# Altium PCB AVR Board 4.0 R1.2 Alternate.PcbDoc (part 2 of 2)
Units mil, origin at the board's own origin, x right, y up, seen from the top; angles counter-clockwise.
Board outline 5050 x 3125 mil, 2 copper layers (Top Layer, Bottom Layer); 127 components, 141 nets, 588 pads, 126 vias.
Unrouted connection lines stored in the file: 100.
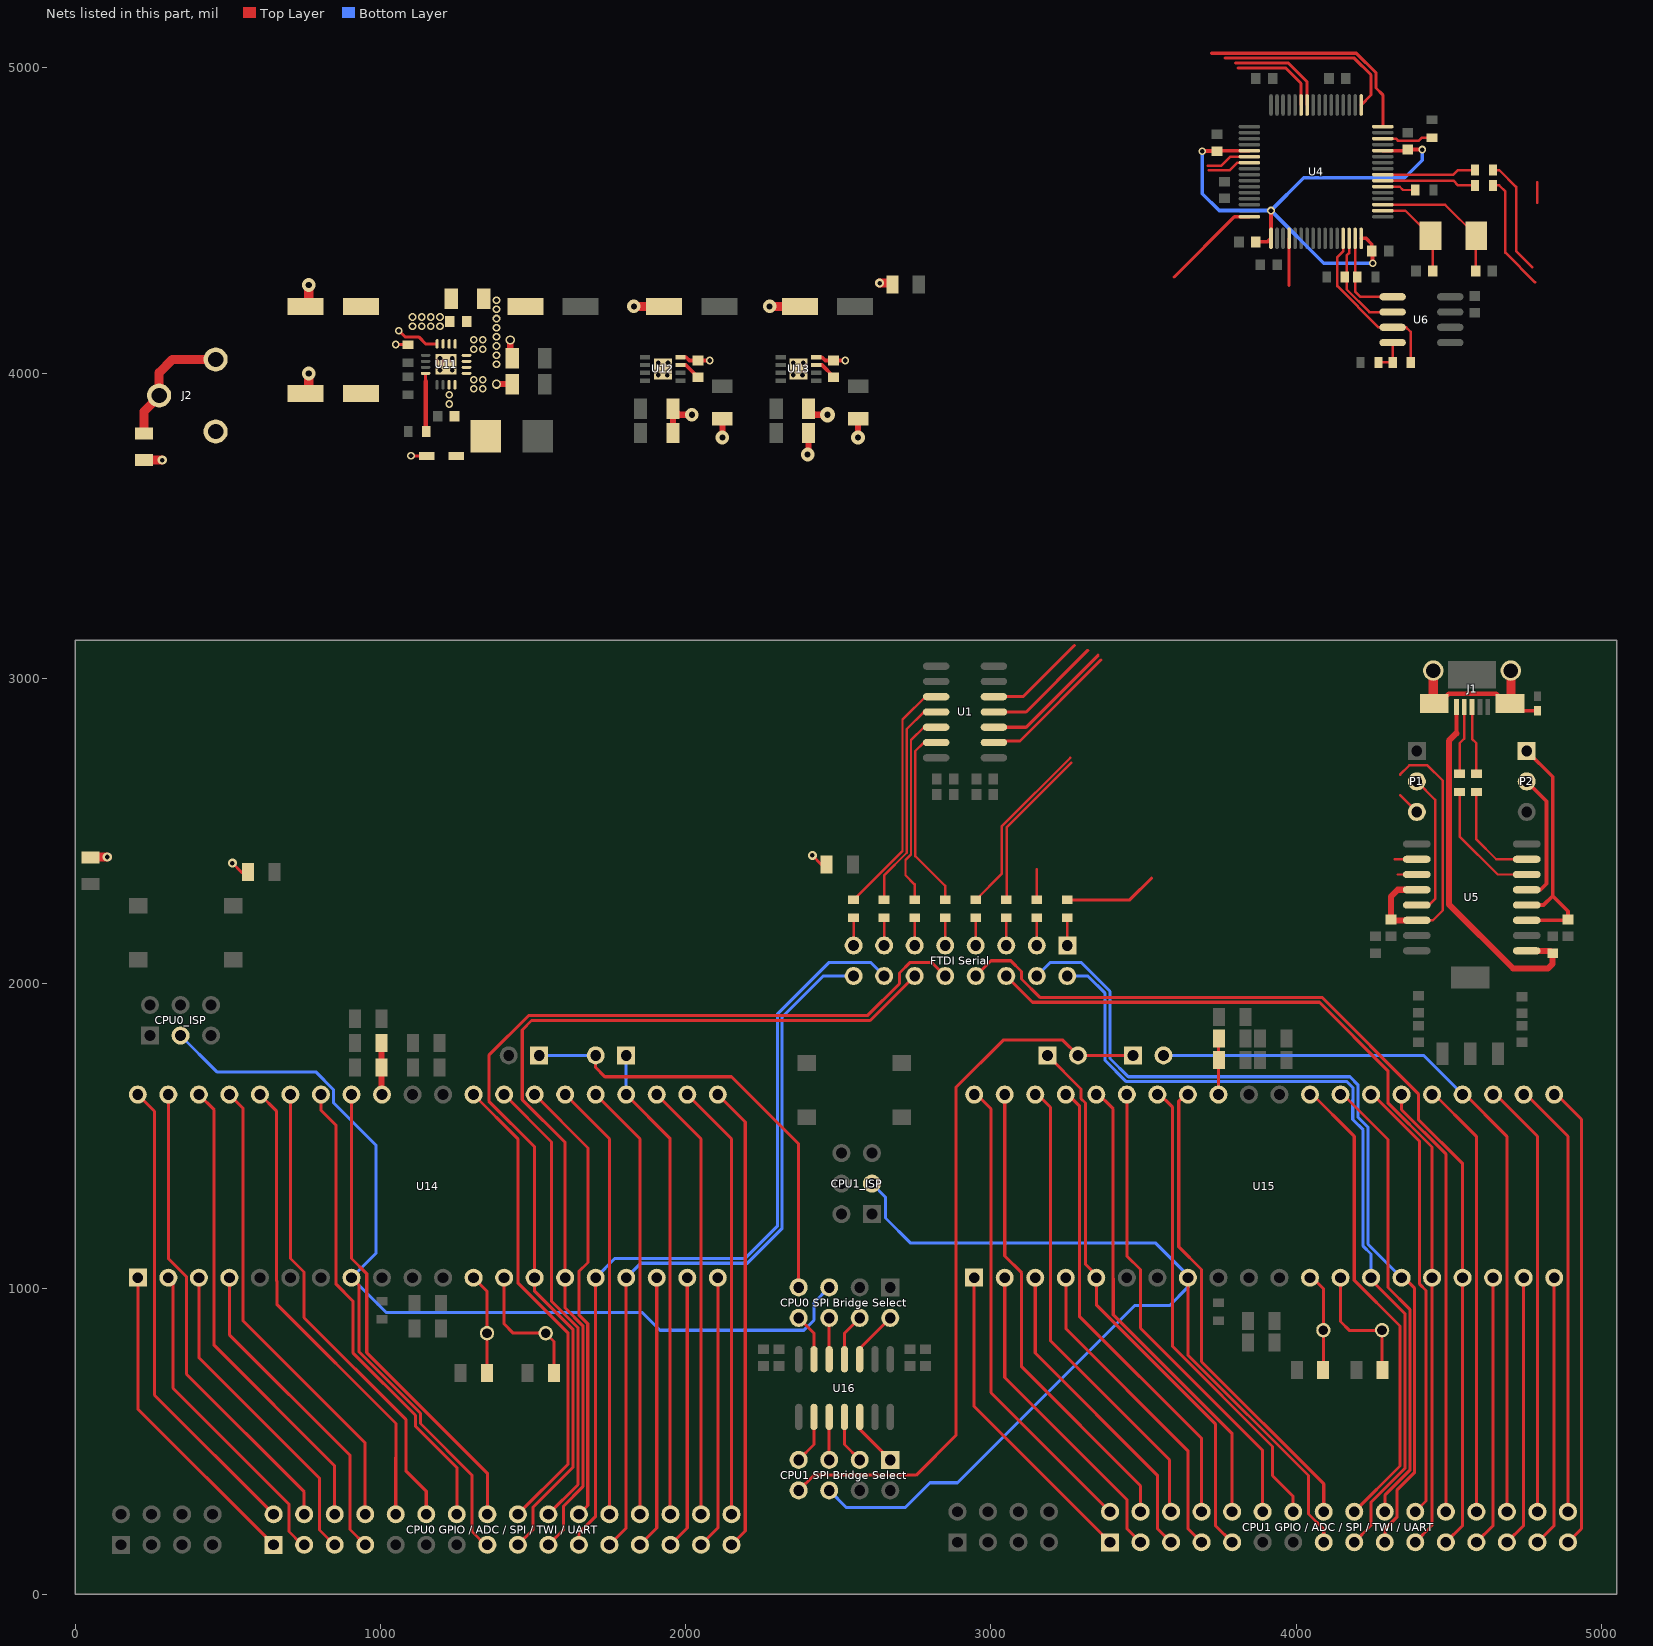
[diagram p2: the nets of this part, all layers, seen from the top]

## Via types
v1: diameter 25, hole 15, Top Layer to Bottom Layer, 82 vias
v2: diameter 30, hole 15, Top Layer to Bottom Layer, 25 vias
v3: diameter 45, hole 20, Top Layer to Bottom Layer, 14 vias
v4: diameter 30, hole 20, Top Layer to Bottom Layer, 4 vias
v5: diameter 50, hole 20, Top Layer to Bottom Layer, 1 vias

## Nets (pads, with @x,y where several pads share a name; then routed paths per layer and width w, separated by ;. In a path a pad name is that pad's centre, name@x,y a point inside that pad or via, vN(x,y) a via of type N, cw(c..) or ccw(c..) an arc to the next point about the centre after c; other vN are vias at no path point) (continued)
NetC17_2: C17.2 C18.2 C19.2 C20.2 U4.12 U4.37 U4.49 U4.64 | length 1926.9
  Top Layer w12: v1(3692.44,4727.44) C18.2@3740,4727.44 ; C18.2@3740,4728.9 U4.37@3846.5,4728.9 ; C20.2@3867.56,4430 3906.14,4430 U4.49@3917.64,4441.5 ; U4.49@3917.36,4441.5 v1(3917.36,4532.64) ; U4.64@4212.64,4441.5 4228.5,4441.5 4247.44,4422.56 C17.2@4247.44,4400 4250,4397.44 v1(4250,4360) ; U4.12@4283.5,4728.9 4361.46,4728.9 C19.2@4365,4732.44 v1(4412.56,4732.44)
  Bottom Layer w12: v1(3692.44,4727.44) 3692.44,4587.56 3747.36,4532.64 v1(3917.36,4532.64) ; v1(4250,4360) 4090,4360 v1(3917.36,4532.64) ; v1(4412.56,4732.44) 4412.56,4697.56 4355,4640 4024.72,4640 v1(3917.36,4532.64)
NetC21_2: C21.2 P1.3 U5.12 U5.14 | length 1097.1
  Top Layer w8: 4340,2617.5 P1.3@4395,2562.5 ; 4340,2685 4370,2715 4430,2715 4480,2665 4480,2240 4447.5,2207.5 U5.14@4394.88,2207.5 ; 4790,4557.5 4790,4625
  Top Layer w20: U5.14@4394.88,2207.5 4312.56,2207.5 C21.2@4310,2210.06 4310,2285 4332.5,2307.5 U5.12@4394.88,2307.5
NetC23_2: C23.2 J1.1 U5.1 | length 1185.5
  Top Layer w12: 4524.8,2819.8 4524.8,2879.04
  Top Layer w20: 4524.8,2819.8 4500,2795 4500,2260 4710,2050 4825,2050 4840,2065 C23.2@4840,2099.94 4832.44,2107.5 U5.1@4755.12,2107.5
NetC24_2: C24.2 P2.1 U5.3 U5.4 | length 841.6
  Top Layer w12: P2.1@4755,2762.5 4840,2677.5 4840,2287.5 ; U5.3@4755.12,2207.5 4887.44,2207.5 C24.2@4890,2210.06 4890,2237.5 4840,2287.5 ; U5.4@4755.12,2257.5 4810,2257.5 4840,2287.5
NetC26_2: C26.2 U4.2 X1.1 | length 308.6
  Top Layer w8: U4.2@4283.5,4532.05 4357.95,4532.05 X1.1@4440,4450 4447.56,4442.44 C26.2@4447.56,4335
NetC27_2: C27.2 U4.3 X1.2 | length 464.1
  Top Layer w8: U4.3@4283.5,4551.73 4487.87,4551.73 X1.2@4589.61,4450 4587.44,4447.83 C27.2@4587.44,4335
NetC48_2: C48.2 U12.3 | length 73.6
  Top Layer w12: U12.3@1983.07,4026.57 1999.65,4026.57 C48.2@2040,3986.22
NetC53_2: C53.2 U13.3 | length 74.9
  Top Layer w12: U13.3@2427.52,4026.57 2446.2,4026.57 2484.45,3988.32 C53.2@2484.45,3986.22
NetC63_2: C63.2 FB7.2 U14.32 | length 169
  Top Layer w20: FB7.2@1003.31,1805 C63.2@1003.31,1725 1003.31,1638.41 U14.32@1005,1636.72
NetC65_2: C65.2 FB8.2 U15.32 | length 175.7
  Top Layer w10: U15.32@3745,1645 3745,1818.31 FB8.2@3746.69,1820
NetC66_2: C66.2 U14.12 X2.1 | length 329.3
  Top Layer w10: U14.12@1305,1036.72 1348.94,992.78 X2.1@1348.94,855 C66.2@1348.94,725.63
NetC67_2: C67.2 U14.13 X2.2 | length 441.5
  Top Layer w10: U14.13@1405,1036.72 1405,885 1435,855 X2.2@1541.06,855 1568.31,827.76 C67.2@1568.31,725
NetC68_2: C68.2 U15.12 X3.1 | length 328.5
  Top Layer w10: U15.12@4045,1045 4088.94,1001.06 X3.1@4088.94,865 4088.94,735.63 C68.2@4088.31,735
NetC69_2: C69.2 U15.13 X3.2 | length 431.1
  Top Layer w10: U15.13@4145,1045 4145,893.28 4175,863.28 X3.2@4281.06,863.28 ; X3.2@4281.06,865 X3.2@4281.06,863.28 ; C69.2@4283.31,735 4281.06,737.24 X3.2@4281.06,863.28
"NetCPU0 GPIO / ADC / SPI / TWI / UART_1": "CPU0 GPIO / ADC / SPI / TWI / UART.1" U14.1 | length 1059.3
  Top Layer w10: U14.1@205,1036.72 205,606.72 650,161.72
"NetCPU0 GPIO / ADC / SPI / TWI / UART_2": "CPU0 GPIO / ADC / SPI / TWI / UART.2" U14.40 | length 1559.3
  Top Layer w10: U14.40@205,1636.72 260,1581.72 260,651.72 650,261.72
"NetCPU0 GPIO / ADC / SPI / TWI / UART_3": "CPU0 GPIO / ADC / SPI / TWI / UART.3" U14.2 | length 1065.7
  Top Layer w10: U14.2@305,1036.72 320,1021.72 320,675 700,295 700,205 739.14,165.86 754.14,165.86
"NetCPU0 GPIO / ADC / SPI / TWI / UART_4": "CPU0 GPIO / ADC / SPI / TWI / UART.4" U14.39 | length 1559.3
  Top Layer w10: U14.39@305,1636.72 305,1099.69 364.47,1040.21 364.47,720.53 750,335 750,261.72
"NetCPU0 GPIO / ADC / SPI / TWI / UART_5": "CPU0 GPIO / ADC / SPI / TWI / UART.5" U14.3 | length 1068.1
  Top Layer w10: U14.3@405,1036.72 405,775 800,380 800,210 855,155
"NetCPU0 GPIO / ADC / SPI / TWI / UART_6": "CPU0 GPIO / ADC / SPI / TWI / UART.6" U14.38 | length 1559.3
  Top Layer w10: U14.38@405,1636.72 455,1586.72 455,815 850,420 850,261.72
"NetCPU0 GPIO / ADC / SPI / TWI / UART_7": "CPU0 GPIO / ADC / SPI / TWI / UART.7" U14.4 | length 1059.3
  Top Layer w10: U14.4@505,1036.72 505,850 900,455 900,211.72 950,161.72
"NetCPU0 GPIO / ADC / SPI / TWI / UART_8": "CPU0 GPIO / ADC / SPI / TWI / UART.8" U14.37 | length 1566
  Top Layer w10: U14.37@505,1636.72 549.53,1592.19 549.53,895.47 950,495 950,255
"NetCPU0 GPIO / ADC / SPI / TWI / UART_10": "CPU0 GPIO / ADC / SPI / TWI / UART.10" U14.36 | length 1560.2
  Top Layer w10: U14.36@605,1636.72 660,1581.72 660,1026.72 660.47,1026.24 660.47,949.78 1051,559.25 1051,447.86 1050,446.86 1050,261.72
"NetCPU0 GPIO / ADC / SPI / TWI / UART_12": "CPU0 GPIO / ADC / SPI / TWI / UART.12" U14.35 | length 1559.3
  Top Layer w10: U14.35@705,1636.72 705,1099.69 749.53,1055.16 749.53,905.98 1083,572.51 1083,404.37 1150,337.37 1150,261.72
"NetCPU0 GPIO / ADC / SPI / TWI / UART_14": "CPU0 GPIO / ADC / SPI / TWI / UART.14" U14.34 | length 1559.3
  Top Layer w10: U14.34@805,1636.72 805,1585 855,1535 855,1015 909.53,960.47 909.53,791.24 1115,585.76 1115,550 1250,415 1250,261.72
"NetCPU0 GPIO / ADC / SPI / TWI / UART_16": "CPU0 GPIO / ADC / SPI / TWI / UART.16" U14.33 | length 1559.3
  Top Layer w10: U14.33@905,1636.72 905,1099.69 955,1049.69 955,791.02 1350,396.02 1350,261.72
"NetCPU0 GPIO / ADC / SPI / TWI / UART_17": "CPU0 GPIO / ADC / SPI / TWI / UART.17" "FTDI Serial.10" U14.14 | length 3453.1
  Top Layer w10: 1450,161.72 1500,211.72 1500,285.25 1631,416.25 1631,866.12 1505,992.12 U14.14@1505,1036.72 1505,1465 1355,1615 1355,1765 1485,1895 2595,1895 2700,2000 2700,2035 2735,2070 2805,2070 2850,2025
"NetCPU0 GPIO / ADC / SPI / TWI / UART_18": "CPU0 GPIO / ADC / SPI / TWI / UART.18" U14.29 | length 1571.8
  Top Layer w10: U14.29@1305,1636.72 1450,1491.72 1450,1020 1615,855 1615,426.72 1450,261.72
"NetCPU0 GPIO / ADC / SPI / TWI / UART_19": "CPU0 GPIO / ADC / SPI / TWI / UART.19" "FTDI Serial.12" U14.15 | length 3174.4
  Top Layer w10: 1550,161.72 1600,211.72 1600,289.09 1663,352.09 1663,879.37 1605,937.37 U14.15@1605,1036.72 1605,1479.4 1464.47,1619.93 1464.47,1848.47 1495,1879 2604,1879 2750,2025
"NetCPU0 GPIO / ADC / SPI / TWI / UART_20": "CPU0 GPIO / ADC / SPI / TWI / UART.20" U14.28 | length 1515.4
  Top Layer w10: U14.28@1405,1636.72 1560.47,1481.24 1560.47,959.27 1647,872.75 1647,358.72 1550,261.72
"NetCPU0 GPIO / ADC / SPI / TWI / UART_21": "CPU0 GPIO / ADC / SPI / TWI / UART.21" "FTDI Serial.14" U14.16 | length 2696.5
  Top Layer w10: 1650,161.72 1650,200 1705,255 U14.16@1705,1036.72
  Bottom Layer w10: U14.16@1705,1036.72 1768.28,1100 2195,1100 2300,1205 2300,1900 2470,2070 2605,2070 2650,2025
"NetCPU0 GPIO / ADC / SPI / TWI / UART_22": "CPU0 GPIO / ADC / SPI / TWI / UART.22" U14.27 | length 1483.9
  Top Layer w10: U14.27@1505,1636.72 1680,1461.72 1680,1086.72 1650,1056.72 1650,915 1679,886 1679,290.72 1650,261.72
"NetCPU0 GPIO / ADC / SPI / TWI / UART_23": "CPU0 GPIO / ADC / SPI / TWI / UART.23" "FTDI Serial.16" U14.17 | length 2457.9
  Top Layer w10: 1750,161.72 1805,216.72 U14.17@1805,1036.72
  Bottom Layer w10: U14.17@1805,1036.72 1852.28,1084 2201.63,1084 2316,1198.37 2316,1891 2450,2025 2550,2025
"NetCPU0 GPIO / ADC / SPI / TWI / UART_24": "CPU0 GPIO / ADC / SPI / TWI / UART.24" U14.26 | length 1435.1
  Top Layer w10: U14.26@1605,1636.72 1750,1491.72 1750,261.72
"NetCPU0 GPIO / ADC / SPI / TWI / UART_25": "CPU0 GPIO / ADC / SPI / TWI / UART.25" U14.18 | length 897.8
  Top Layer w10: 1850,161.72 1905,216.72 U14.18@1905,1036.72
"NetCPU0 GPIO / ADC / SPI / TWI / UART_26": "CPU0 GPIO / ADC / SPI / TWI / UART.26" U14.25 | length 1435.1
  Top Layer w10: U14.25@1705,1636.72 1850,1491.72 1850,261.72
"NetCPU0 GPIO / ADC / SPI / TWI / UART_27": "CPU0 GPIO / ADC / SPI / TWI / UART.27" U14.19 | length 897.8
  Top Layer w10: 1950,161.72 2005,216.72 U14.19@2005,1036.72
"NetCPU0 GPIO / ADC / SPI / TWI / UART_28": "CPU0 GPIO / ADC / SPI / TWI / UART.28" P6.1 U14.24 | length 1564.5
  Top Layer w10: U14.24@1805,1636.72 1948.03,1493.69 1948.03,261.72 1950,261.72
  Bottom Layer w10: U14.24@1805,1636.72 P6.1@1805,1765
"NetCPU0 GPIO / ADC / SPI / TWI / UART_29": "CPU0 GPIO / ADC / SPI / TWI / UART.29" U14.20 | length 897.8
  Top Layer w10: 2050,161.72 2105,216.72 U14.20@2105,1036.72
"NetCPU0 GPIO / ADC / SPI / TWI / UART_30": "CPU0 GPIO / ADC / SPI / TWI / UART.30" U14.23 | length 1435.1
  Top Layer w10: U14.23@1905,1636.72 2050,1491.72 2050,261.72
"NetCPU0 GPIO / ADC / SPI / TWI / UART_31": "CPU0 GPIO / ADC / SPI / TWI / UART.31" U14.21 | length 1530.9
  Top Layer w10: U14.21@2105,1636.72 2195,1546.72 2195,206.72 2150,161.72
"NetCPU0 GPIO / ADC / SPI / TWI / UART_32": "CPU0 GPIO / ADC / SPI / TWI / UART.32" U14.22 | length 1435.1
  Top Layer w10: U14.22@2005,1636.72 2150,1491.72 2150,261.72
"NetCPU0 SPI Bridge Select_2": "CPU0 SPI Bridge Select.2" U16.10 | length 141.4
  Top Layer w10: U16.10@2570,805 2670,905
"NetCPU0 SPI Bridge Select_4": "CPU0 SPI Bridge Select.4" U16.11 | length 156.2
  Top Layer w10: U16.11@2520,769.49 2520,855 2570,905
"NetCPU0 SPI Bridge Select_6": "CPU0 SPI Bridge Select.6" U16.12 | length 135.5
  Top Layer w10: U16.12@2470,769.49 2470,905
"NetCPU0 SPI Bridge Select_7": "CPU0 SPI Bridge Select.7" P3.1 P6.2 | length 1463.6
  Top Layer w10: P6.2@1705,1765 1705,1725 1735,1695 2150,1695 2370,1475 2370,1005
  Bottom Layer w10: P3.1@1520,1765 P6.2@1705,1765
"NetCPU0 SPI Bridge Select_8": "CPU0 SPI Bridge Select.8" U16.13 | length 156.2
  Top Layer w10: 2370,905 2420,855 U16.13@2420,769.49
"NetCPU1 GPIO / ADC / SPI / TWI / UART_1": "CPU1 GPIO / ADC / SPI / TWI / UART.1" U15.1 | length 1059.3
  Top Layer w10: U15.1@2945,1045 2945,615 3390,170
"NetCPU1 GPIO / ADC / SPI / TWI / UART_2": "CPU1 GPIO / ADC / SPI / TWI / UART.2" U15.40 | length 1559.3
  Top Layer w10: U15.40@2945,1645 3000,1590 3000,660 3390,270
"NetCPU1 GPIO / ADC / SPI / TWI / UART_3": "CPU1 GPIO / ADC / SPI / TWI / UART.3" U15.2 | length 1059.3
  Top Layer w10: U15.2@3045,1045 3045,710 3445,310 3445,215 3490,170
"NetCPU1 GPIO / ADC / SPI / TWI / UART_4": "CPU1 GPIO / ADC / SPI / TWI / UART.4" U15.39 | length 1559.3
  Top Layer w10: U15.39@3045,1645 3045,1107.97 3100.47,1052.5 3100.47,744.53 3490,355 3490,270
"NetCPU1 GPIO / ADC / SPI / TWI / UART_5": "CPU1 GPIO / ADC / SPI / TWI / UART.5" U15.3 | length 1059.3
  Top Layer w10: U15.3@3145,1045 3145,790 3545,390 3545,215 3590,170
"NetCPU1 GPIO / ADC / SPI / TWI / UART_6": "CPU1 GPIO / ADC / SPI / TWI / UART.6" U15.38 | length 1559.3
  Top Layer w10: U15.38@3145,1645 3195,1595 3195,830 3585,440 3585,275 3590,270
"NetCPU1 GPIO / ADC / SPI / TWI / UART_7": "CPU1 GPIO / ADC / SPI / TWI / UART.7" U15.4 | length 1059.3
  Top Layer w10: U15.4@3245,1045 3245,870 3645,470 3645,215 3690,170
"NetCPU1 GPIO / ADC / SPI / TWI / UART_8": "CPU1 GPIO / ADC / SPI / TWI / UART.8" U15.37 | length 1559.3
  Top Layer w10: U15.37@3245,1645 3289.53,1600.47 3289.53,910.47 3690,510 3690,270
"NetCPU1 GPIO / ADC / SPI / TWI / UART_9": "CPU1 GPIO / ADC / SPI / TWI / UART.9" P4.1 U15.5 | length 1845.6
  Top Layer w10: P4.1@3185,1765 3295,1655 3295,1623.28 3309.53,1608.76 3309.53,1080.47 3345,1045 3345,947.88 3735,557.88 3735,225 3790,170
"NetCPU1 GPIO / ADC / SPI / TWI / UART_10": "CPU1 GPIO / ADC / SPI / TWI / UART.10" U15.36 | length 1559.3
  Top Layer w10: U15.36@3345,1645 3400,1590 3400,1035 3400.47,1034.53 3400.47,915.04 3790,525.51 3790,270
"NetCPU1 GPIO / ADC / SPI / TWI / UART_12": "CPU1 GPIO / ADC / SPI / TWI / UART.12" U15.35 | length 1559.3
  Top Layer w10: U15.35@3445,1645 3445,1107.97 3489.53,1063.44 3489.53,871.24 3890,470.76 3890,270
"NetCPU1 GPIO / ADC / SPI / TWI / UART_14": "CPU1 GPIO / ADC / SPI / TWI / UART.14" U15.34 | length 1559.3
  Top Layer w10: U15.34@3545,1645 3595,1595 3595,811.02 3922,484.02 3922,388 3990,320 3990,270
"NetCPU1 GPIO / ADC / SPI / TWI / UART_16": "CPU1 GPIO / ADC / SPI / TWI / UART.16" U15.33 | length 1584.2
  Top Layer w10: U15.33@3645,1645 3615,1615 3615,1137.97 3689.53,1063.44 3689.53,761.75 4090,361.27 4090,270
"NetCPU1 GPIO / ADC / SPI / TWI / UART_17": "CPU1 GPIO / ADC / SPI / TWI / UART.17" "FTDI Serial.2" U15.14 | length 2853.4
  Top Layer w10: 4190,170 4245,225 4245,301.37 4356,412.37 4356,919 4245,1030 U15.14@4245,1036.72 U15.14@4245,1045
  Bottom Layer w10: 3250,2025 3317.37,2025 3374,1968.37 3374,1748.37 3443.37,1679 4166,1679 4185.53,1659.47 4185.53,1619.93 4185,1619.4 4185,1555 4219,1521 4219,1140.09 4245,1114.09 U15.14@4245,1036.72
"NetCPU1 GPIO / ADC / SPI / TWI / UART_18": "CPU1 GPIO / ADC / SPI / TWI / UART.18" U15.29 | length 1559.3
  Top Layer w10: U15.29@4045,1645 4190,1500 4190,1028.28 4340,878.28 4340,420 4190,270
"NetCPU1 GPIO / ADC / SPI / TWI / UART_19": "CPU1 GPIO / ADC / SPI / TWI / UART.19" "FTDI Serial.4" U15.15 | length 2990.5
  Top Layer w10: 4290,170 4290,212.69 4330.53,253.21 4330.53,341.65 4388,399.12 4388,1002 U15.15@4345,1045
  Bottom Layer w10: 3150,2025 3195,2070 3295,2070 3390,1975 3390,1755 3450,1695 4175.94,1695 4201.88,1669.06 4201.88,1563.12 4235,1530 4235,1146.72 U15.15@4345,1036.72
"NetCPU1 GPIO / ADC / SPI / TWI / UART_20": "CPU1 GPIO / ADC / SPI / TWI / UART.20" U15.28 | length 1503
  Top Layer w10: U15.28@4145,1645 4300.47,1489.53 4300.47,1004.53 4372,933 4372,405.75 4290,323.75 4290,270
"NetCPU1 GPIO / ADC / SPI / TWI / UART_21": "CPU1 GPIO / ADC / SPI / TWI / UART.21" "FTDI Serial.6" U15.16 | length 3006.2
  Top Layer w10: 3050,2025 3136,1939 4076,1939 4300,1715 4300,1609.75 4445,1464.75 U15.16@4445,1036.72 4445,225 4390,170
"NetCPU1 GPIO / ADC / SPI / TWI / UART_22": "CPU1 GPIO / ADC / SPI / TWI / UART.22" U15.27 | length 1464.1
  Top Layer w10: U15.27@4245,1645 4245,1642.12 4404.47,1482.65 4404.47,1015.53 4425,995 4425,305 4390,270
"NetCPU1 GPIO / ADC / SPI / TWI / UART_23": "CPU1 GPIO / ADC / SPI / TWI / UART.23" "FTDI Serial.8" U15.17 | length 3217.8
  Top Layer w10: 2950,2025 3000,2075 3065,2075 3100,2040 3100,2015 3160,1955 4084.03,1955 4400,1639.03 4400,1555 4545,1410 U15.17@4545,1036.72 4545,225 4490,170
"NetCPU1 GPIO / ADC / SPI / TWI / UART_24": "CPU1 GPIO / ADC / SPI / TWI / UART.24" U15.26 | length 1435.1
  Top Layer w10: U15.26@4345,1645 4345,1587.37 4490,1442.37 4490,270
"NetCPU1 GPIO / ADC / SPI / TWI / UART_25": "CPU1 GPIO / ADC / SPI / TWI / UART.25" U15.18 | length 897.8
  Top Layer w10: 4590,170 4645,225 U15.18@4645,1045
"NetCPU1 GPIO / ADC / SPI / TWI / UART_26": "CPU1 GPIO / ADC / SPI / TWI / UART.26" U15.25 | length 1435.1
  Top Layer w10: U15.25@4445,1645 4590,1500 4590,270
"NetCPU1 GPIO / ADC / SPI / TWI / UART_27": "CPU1 GPIO / ADC / SPI / TWI / UART.27" U15.19 | length 897.8
  Top Layer w10: 4690,170 4745,225 U15.19@4745,1045
"NetCPU1 GPIO / ADC / SPI / TWI / UART_28": "CPU1 GPIO / ADC / SPI / TWI / UART.28" P5.2 U15.24 | length 2468.2
  Top Layer w10: U15.24@4545,1645 4690,1500 4690,270
  Bottom Layer w10: P5.2@3565,1765 4416.72,1765 U15.24@4545,1636.72
"NetCPU1 GPIO / ADC / SPI / TWI / UART_29": "CPU1 GPIO / ADC / SPI / TWI / UART.29" U15.20 | length 897.8
  Top Layer w10: 4790,170 4845,225 U15.20@4845,1045
"NetCPU1 GPIO / ADC / SPI / TWI / UART_30": "CPU1 GPIO / ADC / SPI / TWI / UART.30" U15.23 | length 1435.1
  Top Layer w10: U15.23@4645,1645 4790,1500 4790,270
"NetCPU1 GPIO / ADC / SPI / TWI / UART_31": "CPU1 GPIO / ADC / SPI / TWI / UART.31" U15.21 | length 1530.5
  Top Layer w10: U15.21@4845,1645 4934.53,1555.47 4934.53,214.53 4890,170
"NetCPU1 GPIO / ADC / SPI / TWI / UART_32": "CPU1 GPIO / ADC / SPI / TWI / UART.32" U15.22 | length 1435.1
  Top Layer w10: U15.22@4745,1645 4890,1500 4890,270
"NetCPU1 SPI Bridge Select_1": "CPU1 SPI Bridge Select.1" U16.5 | length 141.4
  Top Layer w10: U16.5@2570,540 2670,440
"NetCPU1 SPI Bridge Select_3": "CPU1 SPI Bridge Select.3" U16.4 | length 161.2
  Top Layer w10: U16.4@2520,580.51 2520,490 2570,440
"NetCPU1 SPI Bridge Select_5": "CPU1 SPI Bridge Select.5" U16.3 | length 140.5
  Top Layer w10: 2470,440 U16.3@2470,580.51
"NetCPU1 SPI Bridge Select_7": "CPU1 SPI Bridge Select.7" U16.2 | length 161.2
  Top Layer w10: 2370,440 2420,490 U16.2@2420,580.51
"NetCPU1 SPI Bridge Select_8": "CPU1 SPI Bridge Select.8" P4.2 P5.1 | length 2394.5
  Top Layer w10: 2370,340 2420,390 2755,390 2885,520 2885,1660 3040,1815 3235,1815 P4.2@3285,1765 P5.1@3465,1765
NetFB1_1: FB1.1 J1.6 J1.7 J1.8 J1.9 | length 566.1
  Top Layer w12: J1.9@4713.75,2903.61 4704.02,2893.88 FB1.1@4790,2893.88
  Top Layer w15: J1.6@4451.97,2901.97 4500,2950 4655,2950 J1.9@4700,2905
  Top Layer w30: J1.6@4449.02,2917.36 J1.7@4449.02,2998.13 ; J1.8@4702.95,2998.13 4702.95,2914.41 J1.9@4713.75,2903.61
NetFB2_2: FB2.2 J2.2 J2.3 | length 423
  Top Layer w30: FB2.2@225,3802.09 225,3873.78 274.96,3923.74 J2.3@274.96,3926.89 274.96,4001.18 318.78,4045 J2.2@460,4045
"NetFTDI Serial_1": "FTDI Serial.1" R4.2 | length 90.5
  Top Layer w8: 3250,2125 R4.2@3250,2215.47
"NetFTDI Serial_3": "FTDI Serial.3" R3.2 | length 90.5
  Top Layer w8: 3150,2125 R3.2@3150,2215.47
"NetFTDI Serial_5": "FTDI Serial.5" R2.2 | length 90.5
  Top Layer w8: 3050,2125 R2.2@3050,2215.47
"NetFTDI Serial_7": "FTDI Serial.7" R1.2 | length 90.5
  Top Layer w8: 2950,2125 R1.2@2950,2215.47
"NetFTDI Serial_9": "FTDI Serial.9" R7.2 | length 90.5
  Top Layer w8: 2850,2125 R7.2@2850,2215.47
"NetFTDI Serial_11": "FTDI Serial.11" R8.2 | length 90.5
  Top Layer w8: 2750,2125 R8.2@2750,2215.47
"NetFTDI Serial_13": "FTDI Serial.13" R6.2 | length 90.5
  Top Layer w8: 2650,2125 R6.2@2650,2215.47
"NetFTDI Serial_15": "FTDI Serial.15" R5.2 | length 90.5
  Top Layer w8: 2550,2125 R5.2@2550,2215.47
NetJ1_2: J1.2 R18.1 | length 198.4
  Top Layer w8: R18.1@4535,2687.03 4535,2787.5 4550.39,2802.89 4550.39,2879.04
NetJ1_3: J1.3 R17.1 | length 197.8
  Top Layer w8: 4575.98,2879.04 4575.98,2801.52 4590,2787.5 R17.1@4590,2687.03
NetP1_2: P1.2 U5.13 | length 478.3
  Top Layer w8: U5.13@4394.88,2257.5 4435,2257.5 4455,2277.5 4455,2602.5 P1.2@4395,2662.5
NetP2_2: P2.2 U5.5 | length 435.1
  Top Layer w12: P2.2@4755,2662.5 4820,2597.5 4820,2327.5 4800,2307.5 U5.5@4755.12,2307.5
NetR1_1: R1.1 U4.38 | length 742.5
  Top Layer w8: R1.1@2950,2274.53 3035,2359.53 3035,2515 3260,2740 ; 3710,4680 3755,4680 3784.21,4709.21 U4.38@3846.5,4709.21
NetR2_1: R2.1 U4.39 | length 681.3
  Top Layer w8: R2.1@3051,2275.53 3051,2511.2 3263.8,2724 ; 3713.8,4664 3781.63,4664 3807.15,4689.53 U4.39@3846.5,4689.53
  Top Layer w10: R2.1@3050,2274.53 R2.1@3051,2275.53
NetR3_1: R3.1 U4.48 | length 428.7
  Top Layer w8: R3.1@3150,2274.53 3150,2375
  Top Layer w10: 3600,4315 3797.36,4512.36 U4.48@3846.5,4512.36
NetR4_1: R4.1 U4.52 | length 461.3
  Top Layer w10: R4.1@3250,2274.53 3454.53,2274.53 3526.42,2346.42 ; 3976.42,4286.42 U4.52@3976.42,4441.5
NetR5_1: R5.1 U1.10 | length 791.4
  Top Layer w8: R5.1@2550,2274.53 2710,2434.53 2710,2865 2791.09,2946.09 U1.10@2811.09,2946.09
NetR6_1: R6.1 U1.11 | length 709.8
  Top Layer w8: R6.1@2650,2274.53 2650,2354.73 2724,2428.73 2724,2834 2780,2890 U1.11@2820.51,2890
NetR7_1: R7.1 U1.13 | length 608.2
  Top Layer w8: U1.13@2820.51,2790 2780,2790 2752,2762 2752,2418 2850,2320 R7.1@2850,2274.53
NetR8_1: R8.1 U1.12 | length 643.3
  Top Layer w8: R8.1@2750,2274.53 2750,2325 2720,2355 2720,2404.93 2738,2422.93 2738,2798 2780,2840 U1.12@2820.51,2840
NetR9_1: R9.1 U5.11 | length 449
  Top Layer w8: 4332.5,2357.5 U5.11@4394.88,2357.5 ; R9.1@4644.53,4615 4665,4615 4685,4595 4685,4395 4782.5,4297.5
NetR9_2: R9.2 U4.7 | length 307.9
  Top Layer w8: U4.7@4283.5,4630.47 4514.53,4630.47 4530,4615 R9.2@4585,4615
NetR10_1: R10.1 U5.10 | length 454.9
  Top Layer w8: 4322.5,2407.5 U5.10@4394.88,2407.5 ; R10.1@4644.53,4665 4665,4665 4720,4610 4720,4400 4772.5,4347.5
NetR10_2: R10.2 U4.8 | length 307.6
  Top Layer w8: U4.8@4283.5,4650.16 4515.16,4650.16 4530,4665 R10.2@4585,4665
NetR11_1: R11.1 U4.14 | length 167.8
  Top Layer w8: U4.14@4283.5,4768.27 4326.73,4768.27 4333.19,4761.81 4401.81,4761.81 4410.47,4770.47 R11.1@4445,4770.47
NetR12_1: R12.1 U4.6 | length 111.4
  Top Layer w8: U4.6@4283.5,4610.79 4339.21,4610.79 4350,4600 R12.1@4390.47,4600
NetR13_1: R13.1 U4.63 U6.1 | length 304.1
  Top Layer w8: U4.63@4192.95,4441.5 4192.95,4267.05 4210,4250 U6.1@4315.51,4250
NetR14_1: R14.1 U4.62 U6.2 | length 351.6
  Top Layer w8: U4.62@4173.27,4441.5 4173.27,4393.27 4165,4385 4165,4274.8 4239.8,4200 U6.2@4315.51,4200
NetR15_1: R15.1 R16.1 U6.4 | length 110.9
  Top Layer w8: R15.1@4269.53,4035 R16.1@4315.47,4035 ; R16.1@4315.47,4035 U6.4@4315.51,4100
NetR16_2: R16.2 U4.61 U6.3 | length 566.1
  Top Layer w8: U4.61@4153.58,4441.5 4153.58,4398.58 4135,4380 4135,4285 4270,4150 U6.3@4315.51,4150 4360,4150 4374.53,4135.47 R16.2@4374.53,4035
NetR17_2: R17.2 U5.7 | length 347.5
  Top Layer w8: R17.2@4590,2627.97 4590,2472.5 4655,2407.5 U5.7@4755.12,2407.5
NetR18_2: R18.2 U5.6 | length 417.4
  Top Layer w8: R18.2@4535,2627.97 4535,2482.5 4660,2357.5 U5.6@4755.12,2357.5
NetU1_2: U1.2 U4.27 | length 767.3
  Top Layer w10: U1.2@3000,2795 3095,2795 3360,3060 ; 3810,5000 3965,5000 4015.79,4949.21 U4.27@4015.79,4878.5
NetU1_3: U1.3 U4.26 | length 775.2
  Top Layer w10: U1.3@3009.49,2840 3115,2840 3351,3076 ; 3801,5016 3974,5016 4035.47,4954.53 U4.26@4035.47,4878.5
NetU1_4: U1.4 U4.17 | length 1004.1
  Top Layer w10: U1.4@3009.49,2890 3115,2890 3317,3092 ; 3767,5032 4190.37,5032 4245,4977.37 4245,4910.87 U4.17@4212.64,4878.5
NetU1_5: U1.5 U4.16 | length 1083.3
  Top Layer w10: U1.5@3009.49,2940 3105,2940 3273,3108 ; 3723,5048 4197,5048 4261,4984 4261,4934 4283.5,4911.5 U4.16@4283.5,4807.64
PG: R34.2 U11.8 | length 194
  Top Layer w10: 1148.07,3973.78 U11.8@1148.07,3999.25
  Top Layer w15: R34.2@1148.07,3805.24 1148.07,3973.78
PGND: C37.1 C38.2 C39.2 C40.1 C41.1 C42.2 C43.2 C44.2 C45.1 C46.2 C47.2 C48.1 C49.2 C50.1 C51.2 C52.2 C53.1 D1.1 FB2.1 FB3.2 FB4.2 FB5.2 FB6.2 R35.1 U11.4 U11.14 U11.15 U11.17 U12.4 U12.9 U13.4 U13.9 | length 1558.4
  Top Layer w10: v2(515,2395) 545,2365 FB4.2@566.69,2365 ; v1(1050,4093.78) R35.1@1089.53,4093.78 ; v1(1060,4138.78) 1080,4118.78 1125,4118.78 1148.07,4095.71 U11.4@1185.47,4095.71 ; v1(1100,3728.78) D1.1@1151.77,3728.78 ; v2(2415,2420) 2445,2390 FB3.2@2461.69,2390
  Top Layer w12: C43.2@754.45,3933.78 C43.2@765,3944.33 ; U12.4@1983.07,4052.17 2001.61,4052.17 2012.44,4041.34 C48.1@2040,4041.34 v1(2078.66,4041.34) ; U13.4@2427.52,4052.17 2446.06,4052.17 2456.89,4041.34 C53.1@2484.45,4041.34 v1(2523.11,4041.34)
  Top Layer w20: v4(1380,3963.78) C38.2@1426.85,3963.78 ; C37.1@1425,4050.63 v4(1425,4108.78) ; C44.2@1958.15,3803.78 C45.1@1958.15,3883.78 1978.15,3863.78 v3(2020,3863.78) ; v3(2120,3788.78) C46.2@2120,3850.63 ; v3(2399.45,3733.78) 2402.6,3736.93 C49.2@2402.6,3803.78 ; C50.1@2402.6,3883.78 2422.6,3863.78 v5(2464.45,3863.78) ; v3(2564.45,3788.78) C51.2@2564.45,3850.63
  Top Layer w30: FB5.2@48.31,2415 v2(105,2415) ; FB2.1@225,3715.47 v2@284.53,3715.47 ; C43.2@765,3944.33 v3(765,3998.78) ; C42.2@765,4229.33 v3(765,4288.78) ; v3(1830,4218.78) C47.2@1929.45,4218.78 ; v3(2275,4218.78) C52.2@2373.9,4218.78 ; v2(2635,4295) FB6.2@2671.69,4295
  other v1: 1940,3992.78 2382.45,3992.78 1910,3993.78 2352.45,3993.78 1195,4008.78 1235,4008.78 1380,4028.78 1910,4033.78 1942,4033.78 2352.45,4033.78 2384.45,4033.78 1195,4048.78 1235,4048.78 1380,4058.78 1380,4088.78 1380,4118.78 1380,4148.78 1380,4178.78 1380,4208.78 1380,4238.78
  other v2: 285,3715
SCK_0: "CPU0 GPIO / ADC / SPI / TWI / UART.15" "CPU0 SPI Bridge Select.5" CPU0_ISP.3 U14.8 | length 4075.5
  Top Layer w10: U14.8@905,1036.72 929.53,1012.19 929.53,793.86 1131,592.39 1131,559 1300,390 1300,205 1350,155
  Bottom Layer w10: CPU0_ISP.3@345,1830 464,1711 788.03,1711 845.53,1653.5 845.53,1610.53 985,1471.06 985,1116.72 U14.8@905,1036.72 1019.72,922 1858.25,922 1915.78,864.47 2386.79,864.47 2420,897.69 2420,955 2470,1005
SCK_1: "CPU1 GPIO / ADC / SPI / TWI / UART.15" "CPU1 SPI Bridge Select.6" CPU1_ISP.3 U15.8 | length 3795.9
  Top Layer w10: U15.8@3645,1045 3645,783.65 4040,388.65 4040,262.69 4090,212.69 4090,170
  Bottom Layer w10: 2470,340 2526.53,283.47 2718.47,283.47 2800,365 2890,365 3470,945 3585,945 3645,1005 3645,1045 3540,1150 2736.72,1150 2654.53,1232.19 2654.53,1300.47 CPU1_ISP.3@2610,1345
SW: C36.1 D1.2 L1.1 U11.1 U11.12 U11.13 U11.16
  other v1: 1305,3948.78 1335,3948.78 1305,3978.78 1335,3978.78 1305,4078.78 1335,4078.78 1305,4108.78 1335,4108.78
VIN: C40.2 C41.2 C42.1 C43.1 J2.1 U11.2 U11.3 U11.11
  other v1: 1225,3898.78 1224.84,3928.78 1105,4153.78 1135,4153.78 1165,4153.78 1195,4153.78 1105,4183.78 1135,4183.78 1165,4183.78 1195,4183.78
pads on no net: J1.4 J1.GND U1.6 U1.9 U4.4 U4.9 U4.18 U4.19 U4.21 U4.22 U4.23 U4.24 U4.28 U4.29 U4.30 U4.32 U4.33 U4.34 U4.36 U4.40 U4.41 U4.43 U4.44 U4.45 U4.46 U4.53 U4.54 U4.55 U4.57 U4.58 U4.59 U4.60 U11.6 U11.7 U11.9 U12.2 U12.6 U12.7 U13.2 U13.6 U13.7 U16.6 U16.9

## Polygon pours and split planes (outlines as drawn)
5VCC on Top Layer "Mechanical 15-No Net" (solid, pour order 18): 1570,4098.78 1665,4098.78 1665,3678.78 2330,3678.78 2330,3983.78 2290,3983.78 2290,4038.78 2335,4038.78 2335,4053.78 2340,4053.78 2340,4083.78 2335,4088.78 2255,4088.78 2255,3753.78 1890,3753.78 1890,3983.78 1840,3983.78 1840,4038.78 1890,4038.78 1890,4053.78 1895,4053.78 1895,4083.78 1890,4088.78 1720,4088.78 1720,4258.78 1580,4258.78 1580,4178.78 1500,4178.78 1500,3913.78 1495,3908.78 1450,3908.78 1450,3678.78 1570,3678.78
VIN on Top Layer "Mechanical 15-No Net" (solid, pour order 6): 1230,4073.78 1200,4073.78 1200,4133.78 1080,4133.78 1080,4158.78 995,4158.78 1000,3728.78 330,3728.78 330,3853.78 875,3853.78 875,4283.78 1255,4283.78 1255,4198.78 1245,4198.78 1245,4133.78 1230,4133.78
3.3VCC_3 on Top Layer "Mechanical 15-No Net" (solid, remove dead copper, pour order 27): 2404.03,3988.76 2404.03,3933.76 2551.03,3933.76 2551.03,3978.76 2524.03,3978.76 2509.03,3963.76 2455.03,3963.76 2453.03,3965.76 2453.03,3988.76
PGND on Top Layer "Mechanical 15-No Net" (solid, remove dead copper, pour order 16): 1255,4043.78 1255,4013.78 1395,4013.78 1395,4183.78 1545,4183.78 1545,4253.78 1395,4253.78 1395,4288.78 1300,4288.78 1300,4198.78 1265,4198.78 1265,4133.78 1360,4133.78 1360,4043.78
3.3VCC on Top Layer "Mechanical 15-No Net" (solid, remove dead copper, pour order 27): 1959.58,3988.76 1959.58,3933.76 2106.58,3933.76 2106.58,3978.76 2079.58,3978.76 2064.58,3963.76 2010.58,3963.76 2008.58,3965.76 2008.58,3988.76
SW on Top Layer "Mechanical 15-No Net" (solid, pour order 10): 1240,4003.78 1300,4003.78 1300,3993.78 1355,3993.78 1355,3848.78 1385,3848.78 1385,3738.78 1280,3738.78 1280,3713.78 1220,3713.78 1220,3743.78 1230,3743.78 1230,3878.78 1250,3878.78 1250,3938.78 1240,3938.78
SW on Top Layer "Mechanical 15-No Net" (solid, pour order 12): 1240,4128.78 1240,4063.78 1255,4063.78 1255,4053.78 1355,4053.78 1355,4128.78
VIN on Top Layer "Mechanical 15-No Net" (solid, remove dead copper, pour order 8): 1235,3983.78 1215,3983.78 1215,3948.78 1205,3948.78 1205,3883.78 1245,3883.78 1245,3948.78 1235,3948.78
SW on Bottom Layer "Mechanical 15-No Net" (solid, pour order 4): 1275,3928.78 1275,4128.78 1355,4128.78 1355,3928.78
VIN on Bottom Layer "Mechanical 15-No Net" (solid, pour order 2): 1213.21,4198.78 1213.21,4138.78 1165,4138.78 1165,3948.78 1240,3948.78 1240,3883.78 1090,3883.78 1090,4198.78
GND on Mechanical 15 "Mechanical 15-No Net" (solid, remove dead copper, pour order 38): 0,2350 565,2350 2475,2350 2525,2400 2525,3125 4310,3125 4310,2827.5 4565,2827.5 4575,2817.5 4575,1690 5050,1690 5050,0 4995,0 0,0

## Silkscreen, mask and mechanical layers (free items; w line width, h text height)
Top Overlay:
  text "3.3v / 3.3v" at 2905,350 h75 r90
  text "GND / GND" at 3005,350 h75 r90
  text "5.0v / 5.0v" at 3105,350 h75 r90
  text "GND / GND" at 3205,350 h75 r90
  text "PB0 / PA0" at 3405,350 h75 r90
  text "PB1 / PA1" at 3505,350 h75 r90
  text "PB2 / PA2" at 3605,350 h75 r90
  text "PB3 / PA3" at 3705,350 h75 r90
  text "PB4 / PA4" at 3805,350 h75 r90
  text "PB5 / PA5" at 3905,350 h75 r90
  text "PB6 / PA6" at 4005,350 h75 r90
  text "PB7 / PA7" at 4105,350 h75 r90
  text "PD0 / PC0" at 4210,350 h75 r90
  text "PD1 / PC1" at 4310,350 h75 r90
  text "PD2 / PC2" at 4410,350 h75 r90
  text "PD3 / PC3" at 4510,350 h75 r90
  text "PD4 / PC4" at 4610,350 h75 r90
  text "PD5 / PC5" at 4710,350 h75 r90
  text "PD6 / PC6" at 4810,350 h75 r90
  text "PD7 / PC7" at 4910,350 h75 r90
  text "3.3v / 3.3v" at 165,340 h75 r90
  text "GND / GND" at 265,340 h75 r90
  text "5.0v / 5.0v" at 365,340 h75 r90
  text "GND / GND" at 465,340 h75 r90
  text "PB0 / PA0" at 665,340 h75 r90
  text "PB1 / PA1" at 765,340 h75 r90
  text "PB1 / PA1" at 865,340 h75 r90
  text "PB3 / PA3" at 965,340 h75 r90
  text "PB4 / PA4" at 1065,340 h75 r90
  text "PB5 / PA5" at 1165,340 h75 r90
  text "PB6 / PA6" at 1265,340 h75 r90
  text "PB7 / PA7" at 1365,340 h75 r90
  text "PD0 / PC0" at 1470,340 h75 r90
  text "PD1 / PC1" at 1570,340 h75 r90
  text "PD2 / PC2" at 1670,340 h75 r90
  text "PD3 / PC3" at 1770,340 h75 r90
  text "PD4 / PC4" at 1870,340 h75 r90
  text "PD5 / PC5" at 1970,340 h75 r90
  text "PD6 / PC6" at 2070,340 h75 r90
  text "PD7 / PC7" at 2170,340 h75 r90
Mechanical 15:
  the board outline again, w10